# EAGLE board CocoBra (EAGLE 6.3)
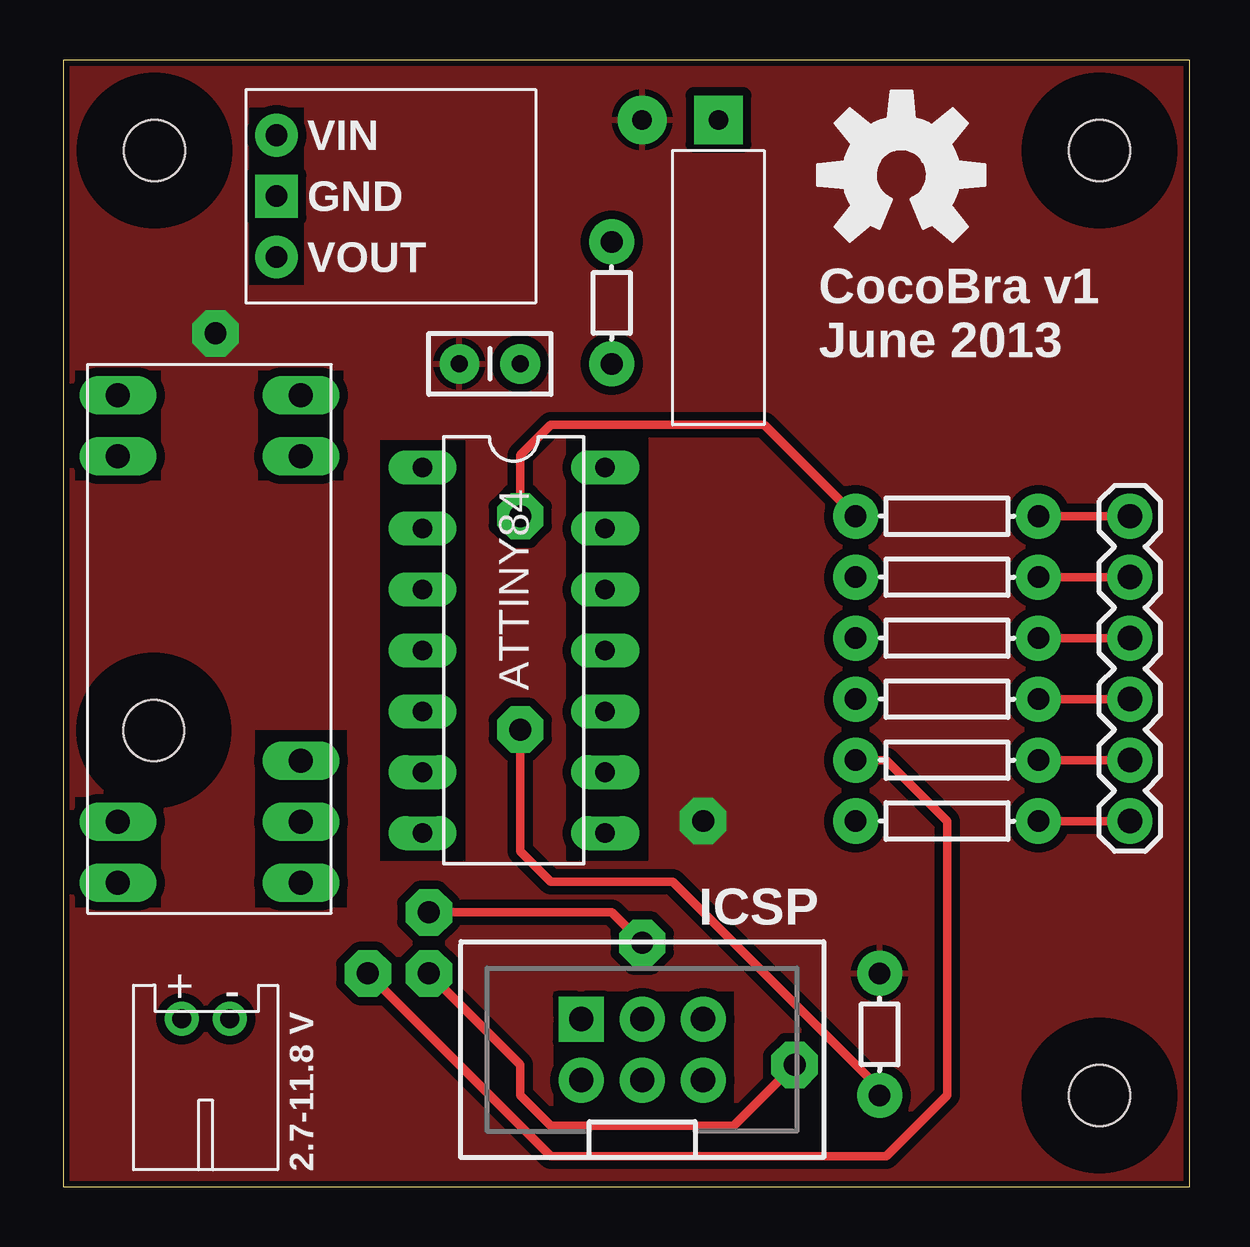
[diagram p0: board, top side]
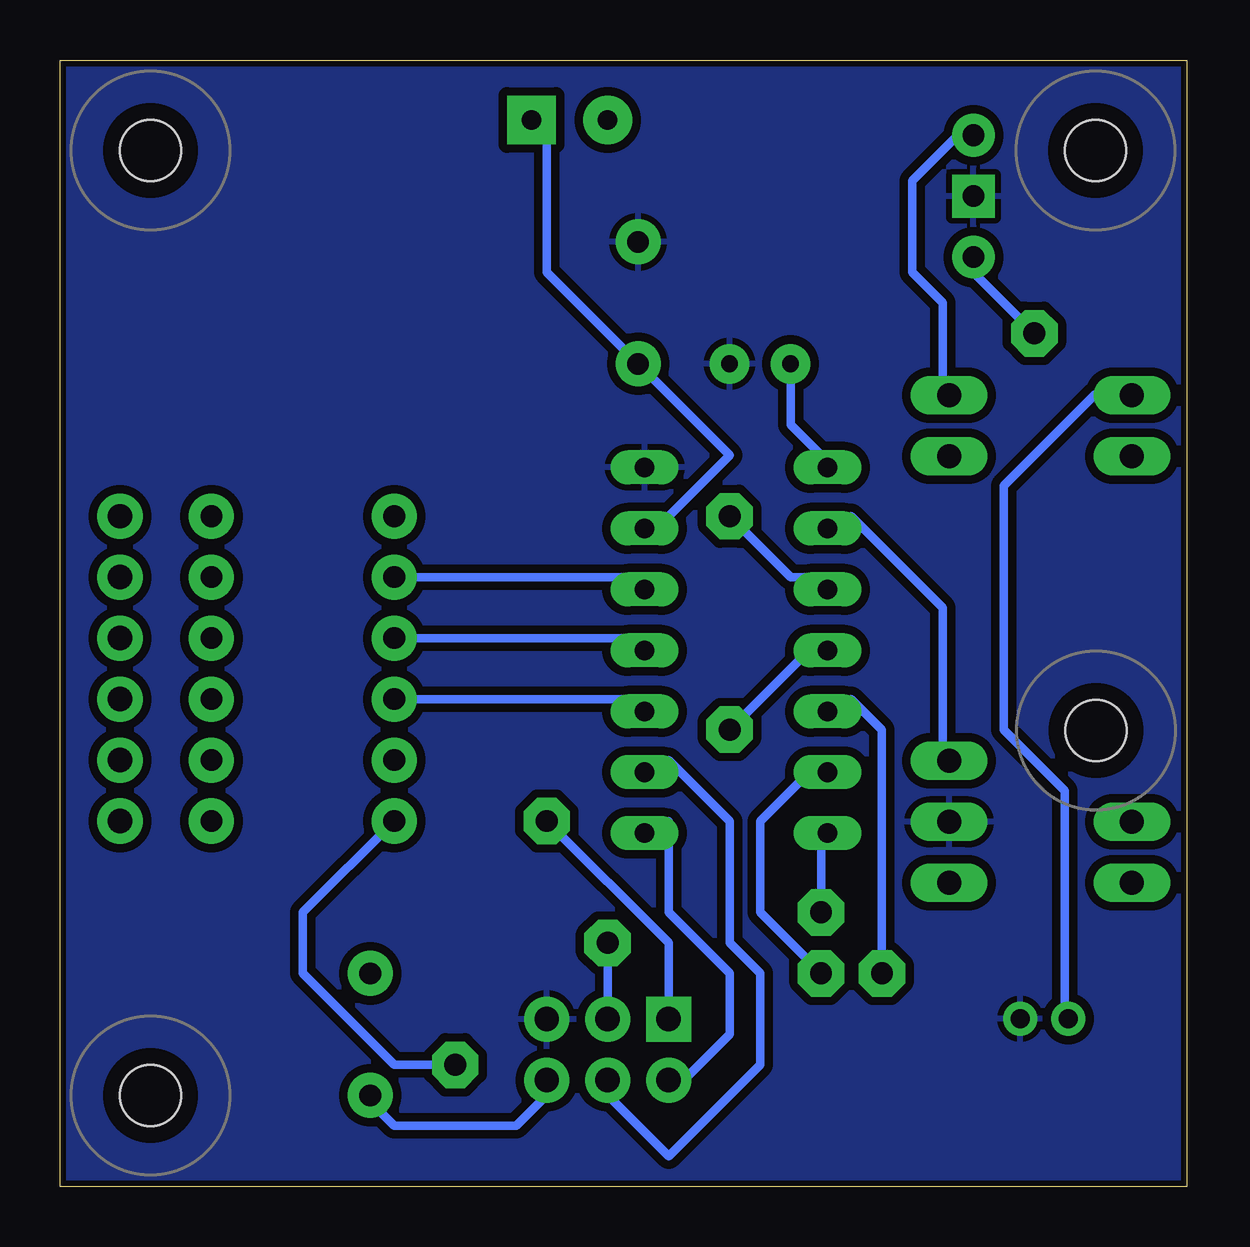
[diagram p1: board, bottom side, seen from below]

Size 46.95 x 46.95 mm. Coordinates in mm from the lower left corner, seen from the top.
Outline: 0,0 46.95,0 46.95,46.95 0,46.95 0,0
Copper layers (1*16): Top 0.035mm / dielectric 1.5mm / Bottom 0.035mm
Design rules "Dek": minimum track width 14mil, minimum drill 36mil, track to track 14mil, track to pad 14mil, pad to pad 14mil, via to via 14mil, smd to smd 0mil, copper to edge 10mil, drill to drill 12mil, minimum pad ring 12mil, minimum via ring 20mil, stop-mask expansion 4mil, vias tented up to drill 25mil, thermal gap 10mil
Net classes: 1 power: width 0.305 mm, clearance 0.305 mm
tRestrict: area 20.4,3.3 to 27.9,8.1; area 7.7,37.6 to 10,45; area 0.5,29.4 to 4.1,34; area 8.1,29.4 to 11.7,34; area 0.5,11.7 to 4.1,16.2; area 8,11.7 to 11.8,19; area 13.2,13.6 to 16.8,31.1; area 21,13.6 to 24.4,31.1

## Footprints (pad centres in the part's own frame; a part is rotated, then mirrored left to right if it is on the bottom)
CAP-PTH-SMALL2 = drill 0.7 pad 1.651: 1 0,0; 2 2.54,0
2X3-SHROUDED = drill 1.016 pad 1.88: 1 -1.27,2.54; 3 -1.27,0; 4 1.27,0; 5 -1.27,-2.54; 6 1.27,-2.54 | drill 1.016 pad 1.88 square: 2 1.27,2.54
1X06 = drill 1.016 pad 1.88: 1 0,0; 2 2.54,0; 3 5.08,0; 4 7.62,0; 5 10.16,0; 6 12.7,0
JST-PH-2-THM-RA = drill 0.8 pad 1.422: 1 1,0; 2 -1,0
AXIAL-0.2 = drill 0.9 pad 1.88: P$1 -2.54,0; P$2 2.54,0
AXIAL-0.3 = drill 0.9 pad 1.88: P$1 -3.81,0; P$2 3.81,0
STAND-OFF-#2 = hole 2.54: 0,0
DIL14 = drill 0.813 long: 1 -7.62,-3.81; 2 -5.08,-3.81; 3 -2.54,-3.81; 4 0,-3.81; 5 2.54,-3.81; 6 5.08,-3.81; 7 7.62,-3.81; 8 7.62,3.81; 9 5.08,3.81; 10 2.54,3.81; 11 0,3.81; 12 -2.54,3.81; 13 -5.08,3.81; 14 -7.62,3.81
POLOLU_POWER_SUPPLY_S7V7F5 = drill 0.9 pad 1.778 square: GND 4.445,1.27 | drill 0.9 pad 1.778: VIN 1.905,1.27; VOUT 6.985,1.27
SWITCH-SPST-TILT = drill 0.813 pad 2.032 square: P1 1.905,-1.27 | drill 0.813 pad 2.032: P2 5.08,-1.27
POLOLU_POWER_SWITCH = drill 1 long: GND 8.89,3.81; GND1 8.89,1.27; GND2 1.27,3.81; GND3 1.27,1.27; OFF 8.89,6.35; VIN 1.27,21.59; VIN1 1.27,19.05; VOUT 8.89,21.59; VOUT1 8.89,19.05

## Placement (x,y rotation side)
C1  0.1uF  [CAP-PTH-SMALL2]  16.51,34.29 0 top
FRAME1  FRAME-LETTER  [CREATIVE_COMMONS]  12.7,-7.62 0 top  (outside the outline)
ICSP  ICSP-AVRPTH  [2X3-SHROUDED]  24.13,5.71 90 top
JP2  [1X06]  44.45,27.94 270 top
PWR  0.7 - 7.0VDC  [JST-PH-2-THM-RA]  5.94,7 180 top
R1  10K  [AXIAL-0.2]  34.02,6.35 90 top
R2  47  [AXIAL-0.3]  36.83,17.78 0 top
R3  750  [AXIAL-0.3]  36.83,27.94 0 top
R4  750  [AXIAL-0.3]  36.83,15.24 0 top
R5  750  [AXIAL-0.3]  36.83,20.32 0 top
R6  750  [AXIAL-0.3]  36.83,22.86 0 top
R7  750  [AXIAL-0.3]  36.83,25.4 0 top
R8  10K  [AXIAL-0.2]  22.86,36.83 90 top
STANDOFF1  STAND-OFF#2  [STAND-OFF-#2]  43.18,43.18 0 top
STANDOFF2  STAND-OFF#2  [STAND-OFF-#2]  43.18,3.81 0 top
STANDOFF3  STAND-OFF#2  [STAND-OFF-#2]  3.78,19.02 0 top
STANDOFF4  STAND-OFF#2  [STAND-OFF-#2]  3.81,43.18 0 top
U3  ATTINY84  [DIL14]  18.78,22.35 270 top
U$1  [OSHW-LOGO-L]  34.92,42.16 0 top
U$2  POWER_SUPPLYPOLOLU_S7V7F5  [POLOLU_POWER_SUPPLY_S7V7F5]  7.62,45.72 270 top
U$3  SWITCH-SPSTTILT  [SWITCH-SPST-TILT]  29.21,43.18 180 top
U$4  POLOLU_POWER_SWITCHPTH  [POLOLU_POWER_SWITCH]  1.02,11.4 0 top

## Library data of the parts
C1 ICSP PWR R1-R8 STANDOFF1-STANDOFF4 U3 U$2-U$4 = Dek
FRAME1 U$1 = SparkFun-Aesthetics
JP2 = SparkFun-Connectors

## Nets
GND [power]: C1.2 ICSP.6 PWR.2 R8.P$2 U3.14 U$2.GND U$4.GND
JP2: JP2.1 R3.P$2
JP3: JP2.2 R7.P$2
JP4: JP2.3 R6.P$2
JP5: JP2.4 R5.P$2
JP6: JP2.5 R2.P$2
JP7: JP2.6 R4.P$2
MISO: ICSP.1 U3.8
MOSI: ICSP.4 U3.7
N$1: R2.P$1 U3.5
N$2: R3.P$1 U3.3
N$3: R4.P$1 U3.6
N$4: R5.P$1 U3.10
N$5: R6.P$1 U3.11
N$6: R7.P$1 U3.12
N$7: R8.P$1 U3.13 U$3.P1
OFF: U3.2 U$4.OFF
RST: ICSP.5 R1.P$1 U3.4
SCK: ICSP.3 U3.9
VCC: C1.1 ICSP.2 R1.P$2 U3.1 U$2.VOUT U$3.P2
VIN [power]: PWR.1 U$4.VIN
VOUT: U$2.VIN U$4.VOUT

## Tracks (layer width: path | path; a pad name or v marks a point on that pad's centre or on a via)
GND
  pour Bottom: 0,0 0,48.26 46.99,48.26 46.99,0
JP2
  Top 0.356: JP2.1 R3.P$2
JP3
  Top 0.356: JP2.2 R7.P$2
JP4
  Top 0.356: JP2.3 R6.P$2
JP5
  Top 0.356: JP2.4 R5.P$2
JP6
  Top 0.356: JP2.5 R2.P$2
JP7
  Top 0.356: JP2.6 R4.P$2
MISO
  Bottom 0.356: U3.8 21.59,15.24 21.59,11.43 19.05,8.89 19.05,6.35 21.59,3.81 ICSP.1
MOSI  (via drill 0.91)
  Top 0.356: v15.24,11.43 22.86,11.43 v24.13,10.16
  Bottom 0.356: v15.24,11.43 15.24,15.24 U3.7 | ICSP.4 v24.13,10.16
N$1  (via drill 0.91)
  Top 0.356: v12.7,8.89 20.32,1.27 34.29,1.27 36.83,3.81 36.83,15.24 34.29,17.78 R2.P$1
  Bottom 0.356: v12.7,8.89 12.7,19.05 13.97,20.32 U3.5
N$2  (via drill 0.91)
  Top 0.356: v19.05,27.94 19.05,30.48 20.32,31.75 29.21,31.75 R3.P$1
  Bottom 0.356: v19.05,27.94 16.51,25.4 15.24,25.4 U3.3
N$3  (via drill 0.91)
  Top 0.356: v15.24,8.89 19.05,5.08 19.05,3.81 20.32,2.54 27.94,2.54 v30.48,5.08
  Bottom 0.356: v15.24,8.89 17.78,11.43 17.78,15.24 15.24,17.78 U3.6 | v30.48,5.08 33.02,5.08 36.83,8.89 36.83,11.43 R4.P$1
N$4
  Bottom 0.356: R5.P$1 22.86,20.32 U3.10
N$5
  Bottom 0.356: R6.P$1 22.86,22.86 U3.11
N$6
  Bottom 0.356: R7.P$1 22.86,25.4 U3.12
N$7
  Bottom 0.356: U3.13 21.59,27.94 19.05,30.48 R8.P$1 26.67,38.1 26.67,44.45 U$3.P1
OFF
  Bottom 0.356: U3.2 13.97,27.94 10.16,24.13 10.16,17.78 U$4.OFF
RST  (via drill 0.91)
  Top 0.356: v19.05,19.05 19.05,13.97 20.32,12.7 25.4,12.7 34.29,3.81 R1.P$1
  Bottom 0.356: v19.05,19.05 15.24,22.86 U3.4 | ICSP.5 26.67,3.81 27.94,2.54 33.02,2.54 34.29,3.81 R1.P$1
SCK
  Bottom 0.356: U3.9 21.59,17.78 19.05,15.24 19.05,10.16 17.78,8.89 17.78,5.08 21.59,1.27 24.13,3.81 ICSP.3
VCC  (via drill 0.91)
  Bottom 0.356: C1.1 16.51,31.75 15.24,30.48 U3.1 | v6.35,35.56 8.89,38.1 U$2.VOUT | ICSP.2 21.59,10.16 v26.67,15.24
  pour Top: 0,0 0,49.53 46.99,49.53 46.99,0
VIN
  Bottom 0.356: PWR.1 5.08,7.62 5.08,16.51 7.62,19.05 7.62,29.21 3.81,33.02 2.54,33.02 U$4.VIN
VOUT
  Bottom 0.356: U$4.VOUT 10.16,33.02 10.16,36.83 11.43,38.1 11.43,41.91 8.89,44.45 U$2.VIN

## Text on the board
tPlace: CocoBra v1 / June 2013 | 2.7-11.8 V